# Altium PCB PCB.PcbDoc
Units mm, origin at the board's own origin, x right, y up, seen from the top; angles counter-clockwise.
Board outline 55 x 45 mm, 2 copper layers (TOP, BOT), stack 1.636 mm thick; 43 components, 30 nets, 130 pads, 37 vias.
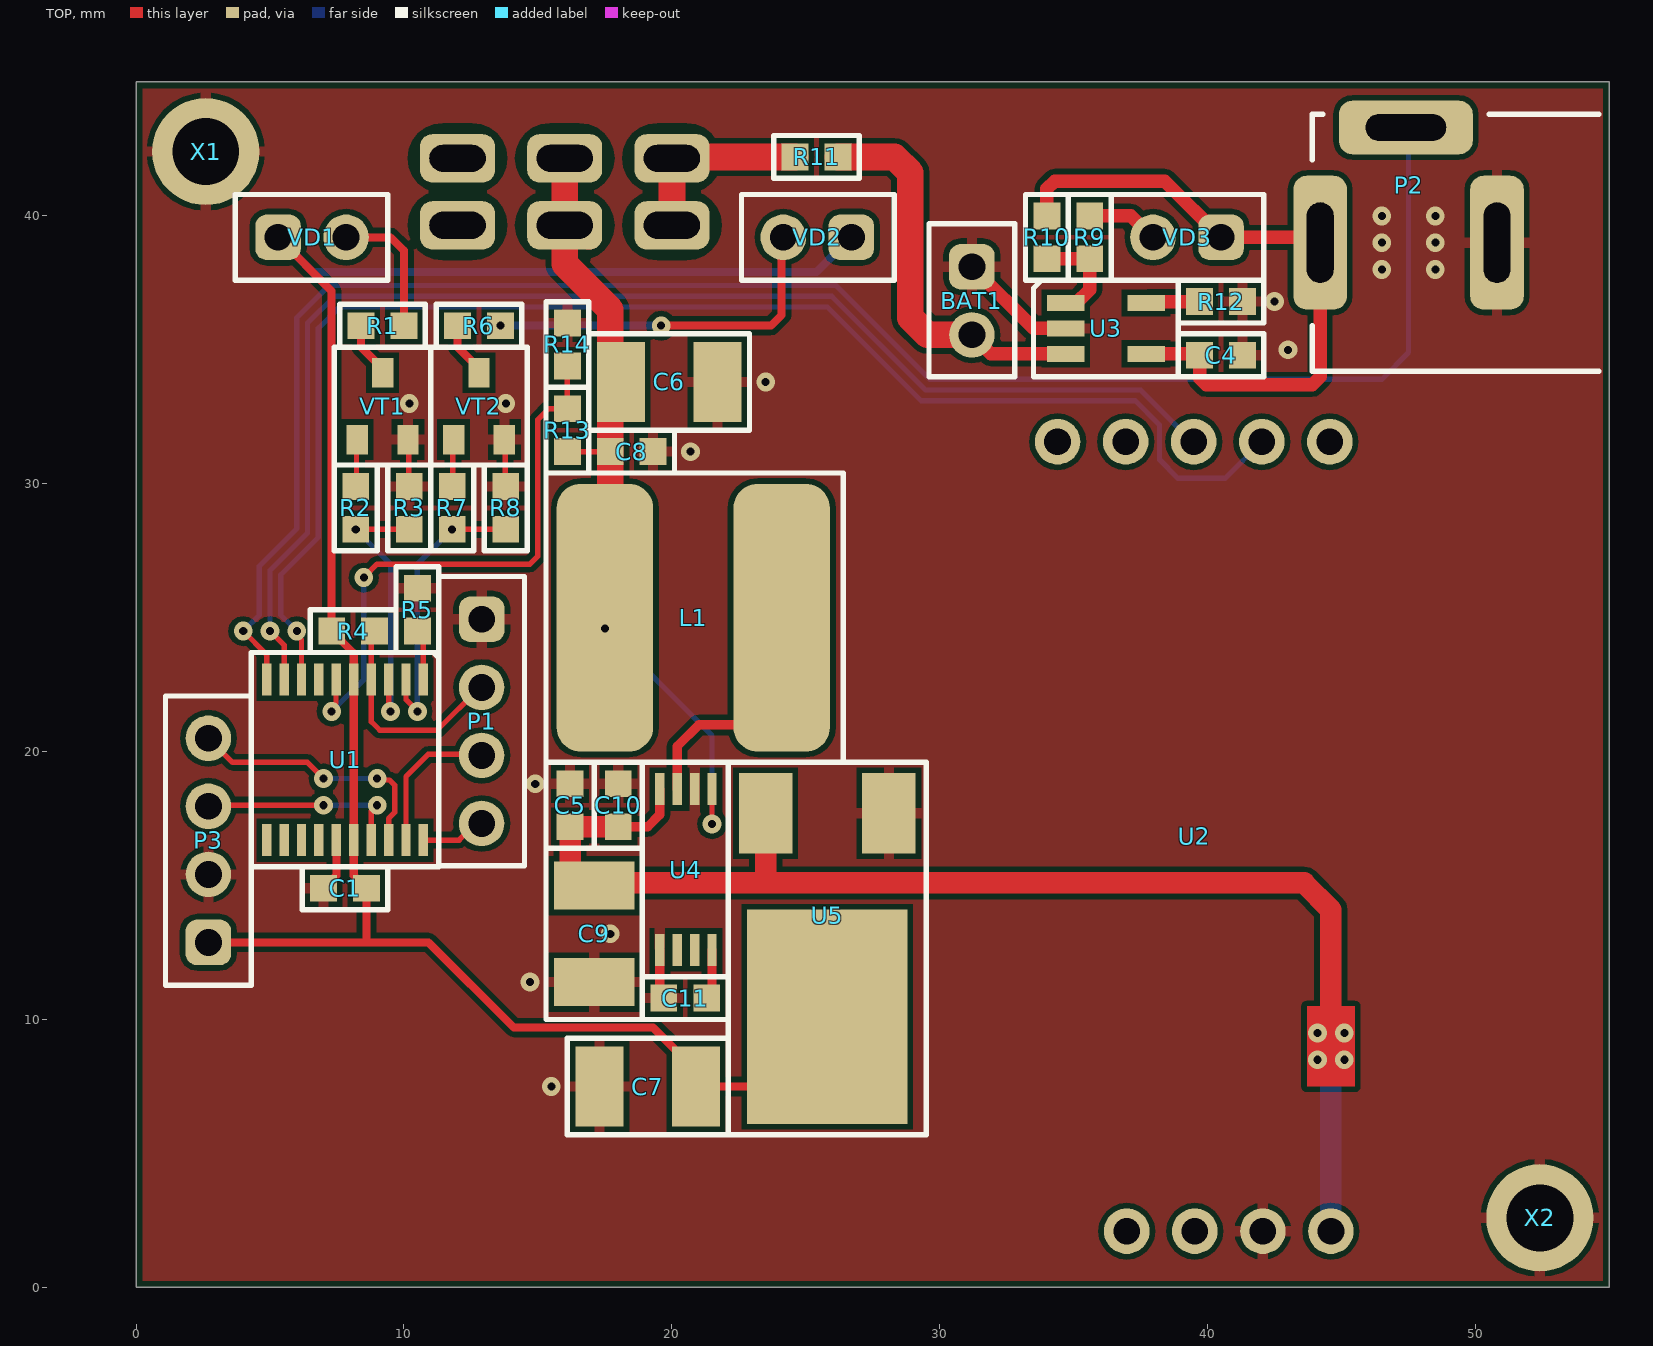
[diagram p0: TOP view]
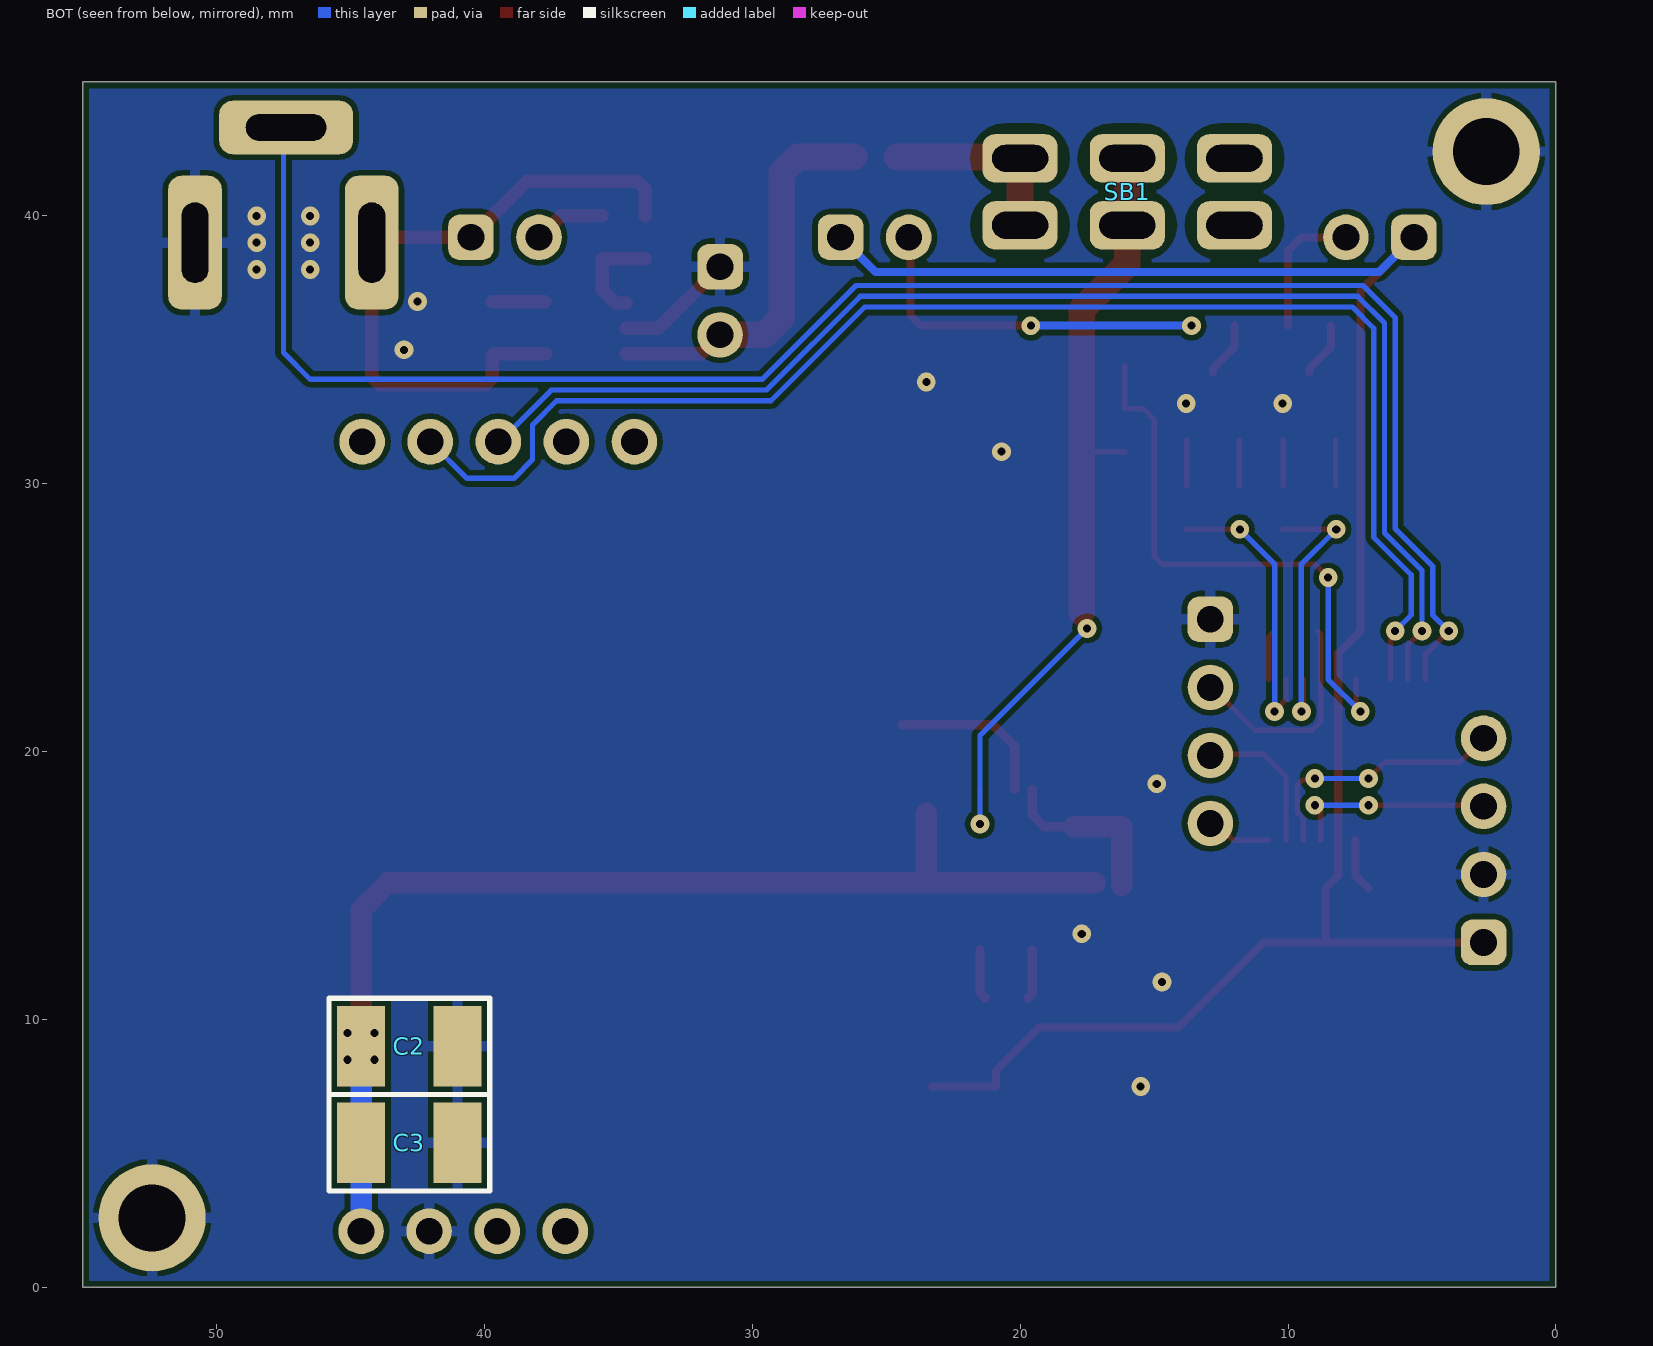
[diagram p1: BOT view, seen from below]
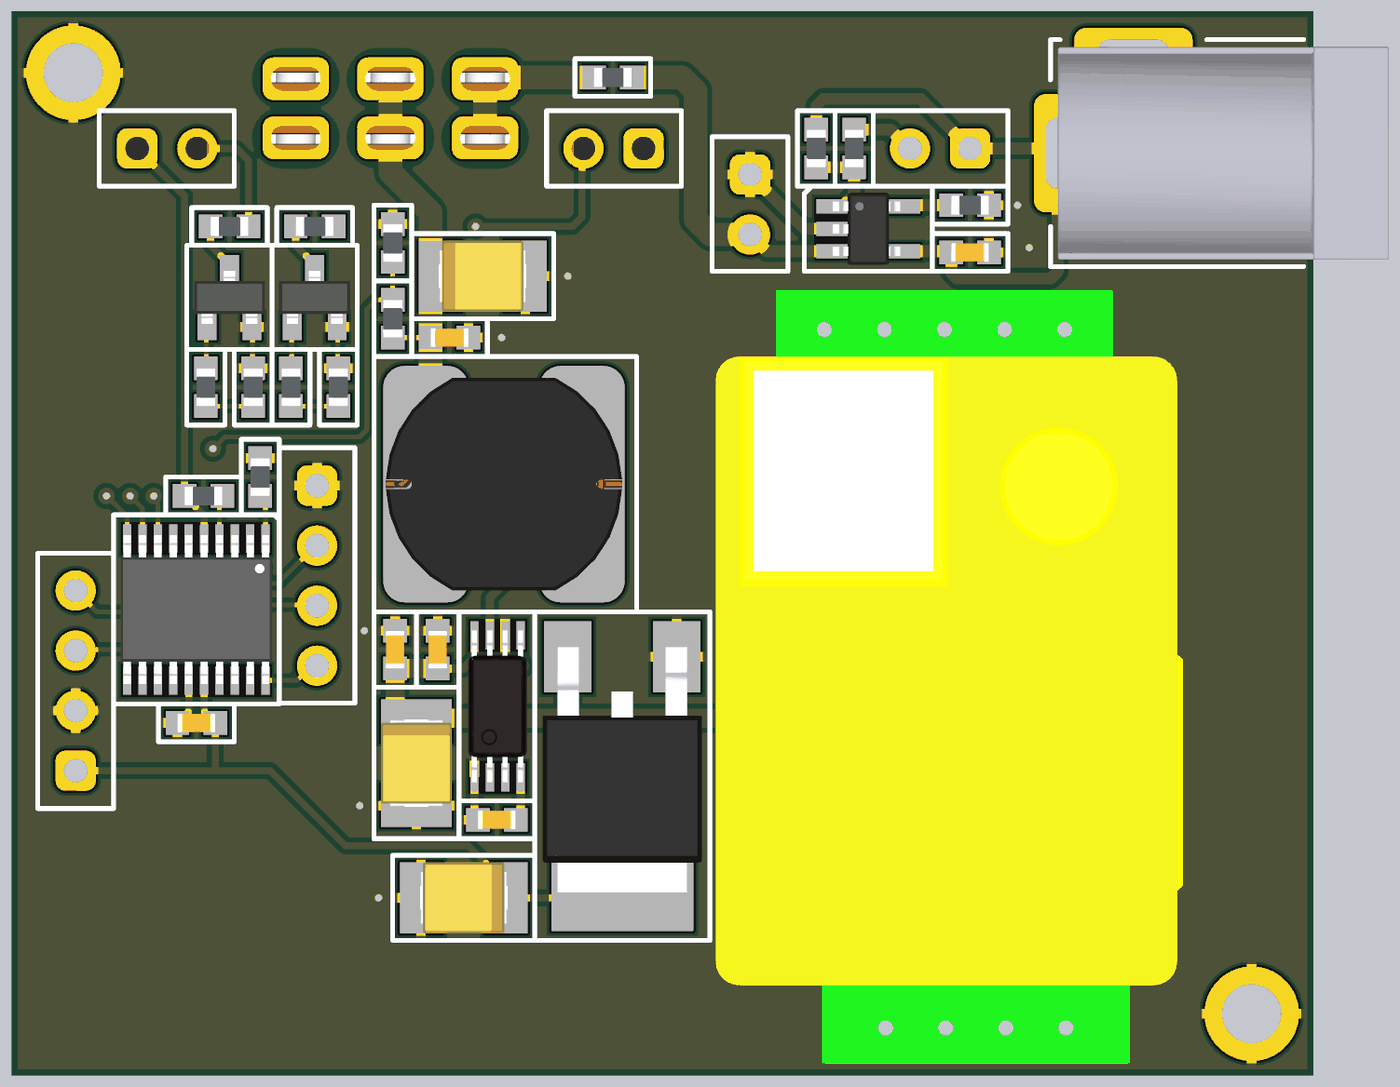
[diagram p2: 3D render of the assembled board from above, using the file's embedded part models]
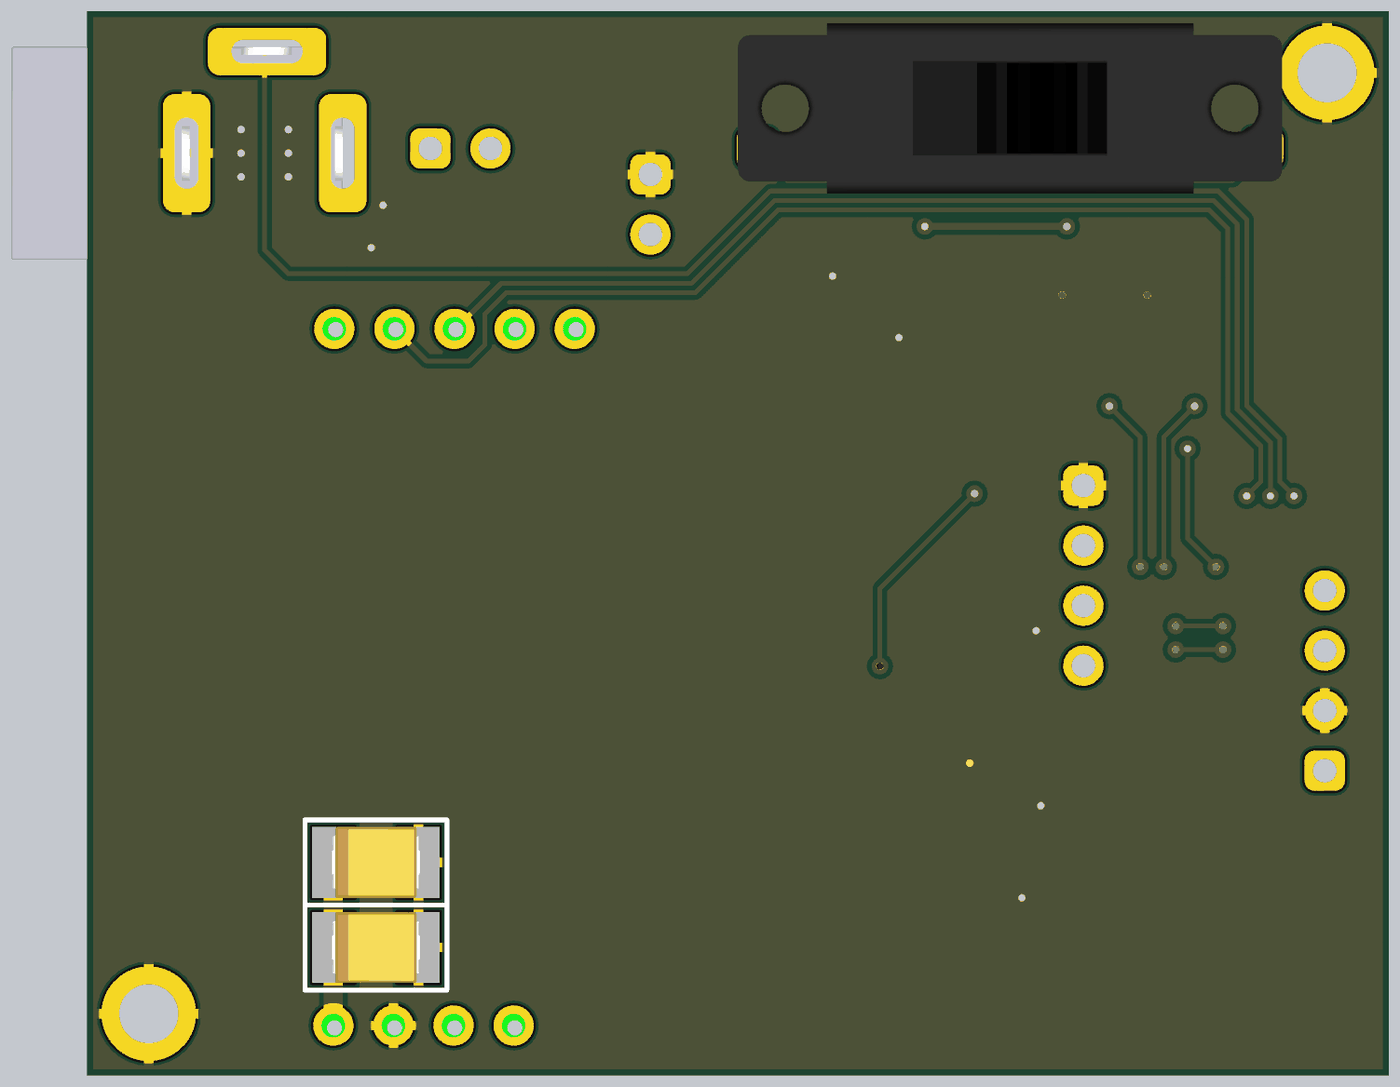
[diagram p3: 3D render of the assembled board from below, using the file's embedded part models]

## Layer stack, top to bottom
Top Solder: solder mask 0.0102, Solder Resist, Dk 3.5
TOP: signal copper 0.018
Dielectric 1: core 1.6, FR-4, Dk 4.2
BOT: signal copper 0.018
Bottom Solder: solder mask 0.0102, Solder Resist, Dk 3.5

## Board outline
0,0 0,45 55,45 55,0

## Design rules (kind name [scope] priority, off if disabled: settings)
AcuteAngle [All] p1 off: minimum=3.50000000000000E+0001 checktracksonly=FALSE
AssemblyTestPointUsage [All] p1 off:
AssemblyTestpoint [All] p1 off: testpointundercomponent=TRUE minsize=1.016 maxsize=2.54 preferedsize=1.524 minholesize=0 maxholesize=1.016 preferedholesize=0.813 testpointgrid=0.025 usegrid=TRUE gridtolerance=0 allowsidetop=TRUE allowsidebottom=TRUE
BoardOutlineClearance "BoardOutlineClearance 1" [All] p1: gap=0.25 ignorepadtopadclearanceinfootprint=FALSE except(0: Arc-SplitContinuation Track-SplitContinuation SMDPad-SplitContinuation THPad-SplitContinuation Via-SplitContinuation Fill-SplitContinuation Poly-SplitContinuation Region-SplitContinuation Text-SplitContinuation) // Milling
BoardOutlineClearance "BoardOutlineClearance 2" [All] p2: gap=0.4 ignorepadtopadclearanceinfootprint=FALSE except(0: Arc-SplitContinuation Track-SplitContinuation SMDPad-SplitContinuation THPad-SplitContinuation Via-SplitContinuation Fill-SplitContinuation Poly-SplitContinuation Region-SplitContinuation Text-SplitContinuation) // V-Cut
Clearance "Clearance-1 1 Oz" [All] p1: gap=0.2 ignorepadtopadclearanceinfootprint=FALSE except(0.25: Arc-Hole Track-Hole SMDPad-Hole THPad-Hole Via-Hole Fill-Hole Poly-Hole Region-Hole Text-Hole) // Standart
Clearance "Clearance-1 1/2 Oz" [All] p2: gap=0.125 ignorepadtopadclearanceinfootprint=FALSE except(0.2: Arc-Fill Arc-Poly Track-Fill Track-Poly SMDPad-SMDPad SMDPad-Fill SMDPad-Poly THPad-Fill THPad-Poly Via-Fill Via-Poly Fill-Fill Fill-Poly Poly-Poly Poly-Region Poly-Text; 0.25: Arc-Hole Track-Hole SMDPad-Hole THPad-Hole Via-Hole Fill-Hole Poly-Hole Region-Hole Text-Hole) // Standart
Clearance "Clearance-2 1 Oz" [All] p3: gap=0.15 ignorepadtopadclearanceinfootprint=FALSE except(0.2: Arc-Fill Arc-Poly Track-Fill Track-Poly SMDPad-Fill SMDPad-Poly THPad-Fill THPad-Poly Via-Fill Via-Poly Fill-Fill Fill-Poly Poly-Poly; 0.25: Arc-Hole Track-Hole SMDPad-Hole THPad-Hole Via-Hole Fill-Hole Poly-Hole Region-Hole Text-Hole) // Advance
Clearance "Clearance-2 1/2 Oz" [All] p4: gap=0.1 ignorepadtopadclearanceinfootprint=FALSE except(0.15: Arc-Fill Arc-Poly Track-Fill Track-Poly SMDPad-SMDPad SMDPad-Fill SMDPad-Poly THPad-Fill THPad-Poly Via-Fill Via-Poly Fill-Fill Fill-Poly Poly-Poly Poly-Region Poly-Text; 0.25: Arc-Hole Track-Hole SMDPad-Hole THPad-Hole Via-Hole Fill-Hole Poly-Hole Region-Hole Text-Hole) // Advance
ComponentClearance [All] p1: gap=0 collisioncheckmode=3 verticalgap=0 showdistances=FALSE
DiffPairsRouting "DiffPairsRouting 1 Oz" [All] p1: maxlimit=0.254 minlimit=0.2 mostfreqgap=0.254 toplayer_minwidth=0.2 toplayer_maxwidth=0.381 toplayer_prefwidth=0.381 bottomlayer_minwidth=0.2 bottomlayer_maxwidth=0.381 bottomlayer_prefwidth=0.381 maxuncoupledlength=12.7
DiffPairsRouting "DiffPairsRouting 1/2 Oz" [All] p2: maxlimit=0.254 minlimit=0.1 mostfreqgap=0.254 toplayer_minwidth=0.1 toplayer_maxwidth=0.381 toplayer_prefwidth=0.381 bottomlayer_minwidth=0.1 bottomlayer_maxwidth=0.381 bottomlayer_prefwidth=0.381 maxuncoupledlength=12.7
FabricationTestPointUsage [All] p1 off: valid=0 allowmultiple=FALSE
FabricationTestpoint [All] p1 off: side=3 testpointundercomponent=TRUE minsize=1.016 maxsize=2.54 preferedsize=1.524 minholesize=0 maxholesize=1.016 preferedholesize=0.813 testpointgrid=0.025 allowsidetop=TRUE allowsidebottom=TRUE usegrid=TRUE gridtolerance=0
HoleSize "Minimum HoleSize" [IsPad] p1: absolutevalues=TRUE maxlimit=5.9 minlimit=0.6 maxpercent=80.000 minpercent=20.000
HoleSize "Minimum HoleSize VIA 1" [IsVia] p2: absolutevalues=TRUE maxlimit=5.9 minlimit=0.3 maxpercent=80.000 minpercent=20.000 // Standart
HoleSize "Minimum HoleSize VIA 2" [IsVia] p3: absolutevalues=TRUE maxlimit=5.9 minlimit=0.2 maxpercent=80.000 minpercent=20.000 // Advance
HoleToHoleClearance Hole2HoleClearance [All] p1: gap=0.25 allowstackedmicrovias=FALSE
MinimumAnnularRing "Minimum AR VIA Standart" [IsVia] p1: minimumring=0.15
MinimumAnnularRing "Minimum AR PAD Standart" [IsPAD] p2: minimumring=0.2
MinimumAnnularRing "Minimum AR VIA Advance" [IsVia] p3: minimumring=0.1
MinimumAnnularRing "Minimum AR PAD Advance" [IsPAD] p4: minimumring=0.15
MinimumSolderMaskSliver "SolderMask Bridge Standart" [All] p1: minsoldermaskwidth=0.15 // All Masks
MinimumSolderMaskSliver "SolderMask Bridge Advance" [All] p2: minsoldermaskwidth=0.1 // Mask LDI
PlaneClearance "PlaneClearance 1 Oz" [All] p1: clearance=0.2
PlaneClearance "PlaneClearance-1 1/2 Oz" [All] p2: clearance=0.2 // Standart
PlaneConnect "TermalConnect 2 Oz" [All] p1: planeconnectstyle=Relief reliefexpansion=0.2 reliefentries=4 reliefconductorwidth=0.3 reliefairgap=0.3 // Standart
PlaneConnect "TermalConnect-1 1 Oz" [All] p2: planeconnectstyle=Relief reliefexpansion=0.2 reliefentries=4 reliefconductorwidth=0.2 reliefairgap=0.2 // Standart
PlaneConnect "TermalConnect-1 1/2 Oz" [All] p3: planeconnectstyle=Relief reliefexpansion=0.2 reliefentries=4 reliefconductorwidth=0.2 reliefairgap=0.2 // Standart
PolygonConnect "PolygonConnect-1 1 Oz" [All] p1: thpad.connectstyle=Relief thpad.reliefconductorwidth=0.4 thpad.reliefentries=4 thpad.polygonreliefangle="90 Angle" thpad.airgapwidth=0.2 smdpad.connectstyle=Relief smdpad.reliefconductorwidth=0.4 smdpad.reliefentries=4 smdpad.polygonreliefangle="90 Angle" smdpad.airgapwidth=0.2 via.connectstyle=Direct via.reliefconductorwidth=0.254 via.reliefentries=4 via.polygonreliefangle="90 Angle" via.airgapwidth=0.254 // Standart
PolygonConnect "PolygonConnect-1 1/2 Oz" [All] p2: thpad.connectstyle=Relief thpad.reliefconductorwidth=0.15 thpad.reliefentries=4 thpad.polygonreliefangle="90 Angle" thpad.airgapwidth=0.2 smdpad.connectstyle=Relief smdpad.reliefconductorwidth=0.2 smdpad.reliefentries=4 smdpad.polygonreliefangle="90 Angle" smdpad.airgapwidth=0.2 via.connectstyle=Direct via.reliefconductorwidth=0.254 via.reliefentries=4 via.polygonreliefangle="90 Angle" via.airgapwidth=0.254 // Standart
RoutingCorners [All] p1 off: cornerstyle=45-Degree minsetback=2.54 maxsetback=2.54
RoutingVias [All] p1: holewidth=0.3 width=0.6 viastyle="Through Hole" minholewidth=0.2 minwidth=0.4 maxholewidth=5.9 maxwidth=6.4
SilkToBoardRegionClearance [All] p1 off:
SilkToSilkClearance Silk2SilkClearance [All] p1 off: silktosilkclearance=0.15
SilkToSolderMaskClearance Silk2SolderMaskClearance [IsPad] p1 off: minsilkscreentomaskgap=0.15 clearancetoexposedcopper=TRUE
SolderMaskExpansion SolderMaskExpansion-1 [All] p1: expansion=0.1 istentingtop=FALSE // Standart
SolderMaskExpansion "SolderMaskExpansion LDI" [All] p2: expansion=0.025 istentingtop=FALSE // Advance
Width "Width 1 Oz" [All] p1: maxlimit=10 minlimit=0.15 preferedwidth=0.2 checkconnectedcopper=TRUE
15 further rules are at their usual default settings.

## Components (designator, comment, footprint, x,y, rotation, side; value= is the part's Value field where it differs from the comment)
BAT1 "19650 Li-ion 3.7V" "PLS-2 2.54" 31.2,38.1 r270 top
C1 "1u 25V" C_0603/1608 7.8,14.9 r180 top
C2 "47u 10V" TECAP_TYPE_B 42.8,9 r180 bottom
C3 "47u 10V" TECAP_TYPE_B 42.8,5.4 r180 bottom
C4 "1u 25V" C_0603/1608 40.5,34.8 r0 top
C5 "1u 25V" C_0603/1608 16.2,18 r90 top
C6 "47u 10V" TECAP_TYPE_B 19.9,33.8 r0 top
C7 "47u 10V" TECAP_TYPE_B 19.1,7.5 r180 top
C8 "1u 25V" C_0603/1608 18.5,31.2 r0 top
C9 "47u 10V" TECAP_TYPE_B 17.1,13.2 r270 top
C10 "100n 25V" C_0603/1608 18,18 r90 top
C11 "100n 25V" C_0603/1608 20.5,10.8 r180 top
L1 "10u 1A (SDR1006-100ML)" L_1006 20.8,25 r0 top
P1 "Debug" "PLS-4 2.54" 12.9,24.94 r270 top
P2 "External power" DC-210 49.7,39 r90 top
P3 "Debug" "PLS-4 2.54" 2.7,12.88 r90 top
R1 "1k" R_0603/1608 9.2,35.9 r0 top
R2 "1k" R_0603/1608 8.2,29.1 r270 top
R3 "100k" R_0603/1608 10.2,29.1 r270 top
R4 "100k" R_0603/1608 8.1,24.5 r0 top
R5 "100k" R_0603/1608 10.5,25.3 r270 top
R6 "1k" R_0603/1608 12.8,35.9 r0 top
R7 "1k" R_0603/1608 11.8,29.1 r270 top
R8 "100k" R_0603/1608 13.8,29.1 r270 top
R9 "15k" R_0603/1608 35.6,39.2 r90 top
R10 "100k" R_0603/1608 34,39.2 r90 top
R11 "1R" R_0603/1608 25.4,42.2 r0 top
R12 "3k" R_0603/1608 40.5,36.8 r0 top
R13 "10k" R_0603/1608 16.1,32 r270 top
R14 "10k" R_0603/1608 16.1,35.2 r270 top
SB1 "Power switch" KBB40_2P2W 16,40.9 r270 bottom
U1 "STM32F030F4P6" SO20_0.65 7.8,19.7 r270 top
U2 "MH-Z19" MH-Z19 39.5,16.8 r180 top
U3 "STC4054GR" SOT23-5 36.2,35.8 r0 top
U4 "L6920DTR" SO8_0.65 20.6,15.6 r90 top locked
U5 "MC33269DT-3.3G" TO252AA/DPAK 25.8,12.1 r180 top
VD1 "" "PLS-2 2.54" 5.3,39.2 r0 top
VD2 "" "PLS-2 2.54" 26.7,39.2 r180 top
VD3 "" "PLS-2 2.54" 40.5,39.2 r180 top
VT1 "IRLML6244" SOT23-3 9.2,32.9 r90 top
VT2 "IRLML6244" SOT23-3 12.8,32.9 r90 top
X1 "Mounting hole" HOLE_M2_D4.0/2.5 2.6,42.4 r0 top
X2 "Mounting hole" HOLE_M2_D4.0/2.5 52.4,2.6 r0 top

## Footprints (in the part's own frame and the unit in brackets; to place one, negate y for a bottom-side part, rotate by r counter-clockwise, add the part's x,y. Pads: shape width x height; smd on the part's side, far side on the other; paste and mask are expansions set on the pad)
C_0603/1608 [mm] "Capacitor, SMD, 0603 (1608 metric)"
  rect 1x1 smd mask+0.1: 1(-0.8,0) 2(0.8,0)
  silkscreen extent -1.6,-0.8 1.6,0.8, body extent -0.8,-0.4 0.8,0.4, height 0.7
DC-210 [mm] "Pitch 2.54"
  rrect50% 5x2 hole 1 slot 3 at 0 deg mask+0.1: 1(0,5.5) 2(0,-1.1)
  rrect50% 2x5 hole 1 slot 3 at 90 deg mask+0.1: 3(4.3,2.3)
  silkscreen extent -4.8,-4.9 4.8,5.8, body extent -4.51,-8.5 4.5,5.5, height 11
HOLE_M2_D4.0/2.5 [mm]
  round 4 hole 2.5 mask+0.1: 1(0,0)
KBB40_2P2W [mm] "Slider switch 3x2-pin"
  rrect50% 1.8x2.8 hole 2.1 slot 1 at 0 deg mask+0.1: 1(-1.25,0) 1(1.25,0) 2(-1.25,4) 2(1.25,4) 3(-1.25,-4) 3(1.25,-4)
  body extent -3.6,-11.5 3.6,11.5, height 15.4
L_1006 [mm] "Inductor, SMD, 1006"
  rrect50% 3.6x10 smd mask+0.1: 1(-3.3,0)
  rrect50% 3.6x10 smd: 2(3.3,0)
  silkscreen extent -5.5,-5.4 5.6,5.4, body extent -5,-4.5 5,4.5, height 4.08
MH-Z19 [mm]
  round 1.7 hole 1: 1(5.1,-14.77) 2(2.56,-14.77) 3(0.02,-14.77) 4(-2.52,-14.77) 5(-5.06,-14.77)
  round 1.7 hole 1 mask+0.1: 6(-5.1,14.7) 7(-2.56,14.7) 8(-0.02,14.7) 9(2.52,14.7)
  body extent -10,-16.4 9.75,16.3, height 11.25
"PLS-2 2.54" [mm] "Pitch 2.54"
  rrect50% 1.7x1.7 hole 1 mask+0.1: 1(0,0)
  round 1.7 hole 1 mask+0.1: 2(2.54,0)
  silkscreen extent -1.6,-1.6 4.1,1.6
"PLS-4 2.54" [mm] "Pitch 2.54"
  rrect50% 1.7x1.7 hole 1 mask+0.1: 1(0,0)
  round 1.7 hole 1 mask+0.1: 2(2.54,0) 3(5.08,0) 4(7.62,0)
  silkscreen extent -1.6,-1.6 9.2,1.6
R_0603/1608 [mm] "Resistor, SMD, 0603 (1608 metric)"
  rect 1x1 smd mask+0.1: 1(-0.8,0) 2(0.8,0)
  silkscreen extent -1.6,-0.8 1.6,0.8, body extent -0.8,-0.4 0.8,0.4, height 0.45
SO8_0.65 [mm]
  rect 1.2x0.35 smd mask+0.1: 1(-3,1.05) 2(-3,0.4) 3(-3,-0.25) 4(-3,-0.9) 5(3,-0.9) 6(3,-0.25) 7(3,0.4) 8(3,1.05)
  silkscreen extent -4,-1.5 4,1.7, body extent -3.21,-1.17 3.22,1.32, height 1.11
SO20_0.65 [mm]
  rect 1.2x0.35 smd mask+0.1: 1(-3,2.925) 2(-3,2.275) 3(-3,1.625) 4(-3,0.975) 5(-3,0.325) 6(-3,-0.325) 7(-3,-0.975) 8(-3,-1.625) 9(-3,-2.275) 10(-3,-2.925) 11(3,-2.925) 12(3,-2.275) 13(3,-1.625) 14(3,-0.975) 15(3,-0.325) 16(3,0.325) 17(3,0.975) 18(3,1.625) 19(3,2.275) 20(3,2.925)
  silkscreen extent -4,-3.5 4,3.5, body extent -3.15,-3.2 3.15,3.2, height 1
SOT23-3 [mm] "SOT23, 3 pins"
  rect 1.1x0.8 smd mask+0.1: 1(-1.25,0.95) 2(-1.25,-0.95) 3(1.25,0)
  silkscreen extent -2.2,-1.8 2.2,1.8, body extent -1.13,-1.5 1.13,1.5, height 1.22
SOT23-5 [mm]
  rect 1.4x0.6 smd mask+0.1: 1(-1.5,0.95) 2(-1.5,0) 3(-1.5,-0.95) 4(1.5,-0.95) 5(1.5,0.95)
  silkscreen extent -2.7,-1.8 2.7,1.8, body extent -1.5,-1.53 1.5,1.52, height 1.45
TECAP_TYPE_B [mm] "Tantalum capacitor, Type B, SMD"
  rect 1.8x3 smd: 1(-1.8,0) 2(1.8,0)
  silkscreen extent -3,-1.8 3,1.8, body extent -1.85,-1.5 1.85,1.5, height 2.1
TO252AA/DPAK [mm] "TO252AA/DPAK package"
  rect 2x3 smd mask+0.1: 1(-2.3,-5.6) 2(2.3,-5.6)
  rect 6x8 smd mask+0.1: 3(0,2)
  silkscreen extent -3.7,-7.5 3.7,6.4, body extent -3.37,-6.01 3.37,4.38, height 2.39

## Part data
BAT1: library part Battery, "Battery"
C1 C4 C5 C8 C10 C11: library part Capacitor, "Non-polarized capacitor"
C2 C3 C6 C7 C9: library part "Capacitor polar", "Polarized capacitor"
L1: library part Inductor, "Inductor"
P1 P3: library part "Header 4", "Header, 4-Pin", LatestRevisionDate=17-Jul-2002, LatestRevisionNote="Re-released for DXP Platform.", Publisher="Altium Limited"
P2: library part DC-210, "Power connector 3.5mm", LatestRevisionDate=17-Jul-2002, LatestRevisionNote="Re-released for DXP Platform.", Publisher="Altium Limited"
R1 R2 R3 R4 R5 R6 R7 R8 R9 R10 R11 R12 R13 R14: library part Resistor, "Resistor"
SB1: library part "Switch 3-pin", "Switch 3-pin"
U1: library part STM32F030F, "32-bit Cortex-M0"
U2: "CO2 sensor"
U3: "Li-ion charger"
U4: "DC-DC step-up switching regulator"
U5: library part LM1117, "LDO voltage regulator"
VD1 VD2 VD3: library part LED, "LED"
VT1 VT2: library part "MOSFET N", "MOSFET N"
X1 X2: "Hole for screw M3, outline D6"

## Via types
v1: diameter 0.7, hole 0.3, TOP to BOT, tented both sides, 37 vias

## Nets (pads, with @x,y where several pads share a name; then routed paths per layer and width w, separated by ;. In a path a pad name is that pad's centre, name@x,y a point inside that pad or via, vN(x,y) a via of type N, cw(c..) or ccw(c..) an arc to the next point about the centre after c; other vN are vias at no path point)
CHARGE_DET: P2.3 U1.10 | length 67
  TOP w0.2: v1(4,24.5) 4.875,23.625 U1.10
  BOT w0.2: v1(4,24.5) 4.6,25.1 4.6,26.931 6,28.331 6,36.2 7.2,37.4 26.131,37.4 29.631,33.9 46.5,33.9 47.5,34.9 47.5,43.2 P2.3
CO2_RX: U1.8 U2.4 | length 53.5
  TOP w0.2: v1(6,24.5) 6,24.365 6.175,24.19 U1.8
  BOT w0.2: v1(6,24.5) 5.4,25.1 5.4,26.6 6.8,28 6.8,35.8 7.6,36.6 25.8,36.6 29.3,33.1 37.3,33.1 38.2,32.2 38.2,30.9 38.9,30.2 40.65,30.2 U2.4
CO2_TX: U1.9 U2.3 | length 49.6
  TOP w0.2: v1(5,24.5) 5.525,23.975 U1.9
  BOT w0.2: v1(5,24.5) 5,26.766 6.4,28.166 6.4,36 7.4,37 25.966,37 29.466,33.5 37.5,33.5 39.08,31.92 U2.3@39.08,31.57
DGND: BAT1.1 C1.2 C2.2 C3.2 C4.2 C5.2 C6.2 C7.2 C8.2 C9.2 C10.2 C11.2 P1.1 P2.2 P3.2 R3.1 R5.1 R8.1 R12.2 R14.1 U1.15 U2.7 U3.2 U4.1 U4.6 U5.1 VT1.2 VT2.2 X1.1 X2.1 | length 11.6
  TOP w0.2: R3.1@10.175,29.925 VT1.2@10.175,31.625 ; R8.1@13.775,29.925 VT2.2@13.775,31.625
  TOP w0.3: C1.2 7.475,15.375 U1.15
  TOP w0.35: U4.1 19.55,10.95 C11.2
  TOP w0.5: BAT1.1@31.307,37.993 33.5,35.8 U3.2
  other v1: 15.5,7.5 14.7,11.4 17.7,13.2 14.9,18.8 20.7,31.2 10.2,33 13.8,33 23.5,33.8 43,35 42.5,36.8 46.5,38 48.5,38 46.5,39 48.5,39 46.5,40 48.5,40
DVDD_3V3: C1.1 C7.1 P3.1 R4.1 U1.5 U1.16 U5.3 VD1.1 VD2.1 | length 73.3
  TOP w0.3: P3.1 8.6,12.88 ; VD1.1 7.3,37.2 R4.1 8.125,23.675 U1.5 U1.16 8.125,15.375 C1.1 8.6,12.88 ; U5.3@23.3,7.5 C7.1 20.9,8.1 19.3,9.7 14.1,9.7 10.92,12.88 8.6,12.88
  BOT w0.3: VD1.1 6.6,37.9 25.4,37.9 VD2.1
DVDD_5V0: C2.1 C3.1 C5.1 C9.1 C10.1 U2.6 U4.8 U5.2 | length 49.2
  TOP w0.35: C10.1 19.1,17.2 19.55,17.65 U4.8
  TOP w0.8: C9.1@16.2,15 C5.1 C10.1 ; C9.1@17.2,15.1 23.5,15.1 ; U5.2 23.5,15.1 ; 44.6,9 44.6,14.1 43.6,15.1 23.5,15.1 ; U2.6@44.9,2.2 U2.6@45,2.1
  BOT w0.8: U2.6 C3.1 C2.1
  other v1: 44.1,8.5 45.1,8.5 44.1,9.5 45.1,9.5
EXT_5V0: C4.1 P2.1 R10.2 U3.4 VD3.1 | length 22.9
  TOP w0.5: R10.2 34,41.007 34.293,41.3 38.4,41.3 VD3.1 P2.1@43.33,39.2 ; U3.4 C4.1@39.65,34.85 ; C4.1 39.7,33.943 39.943,33.7 43.9,33.7 44.2,34 P2.1@44.2,38
I2C1_SCL: P3.3 U1.17 | length 7.8
  TOP w0.2: P3.3@2.655,18.005 P3.3 ; P3.3@2.7,18.005 6.995,18.005 v1(7,18) ; U1.17 8.775,17.775 v1(9,18)
  BOT w0.2: v1(7,18) v1(9,18)
I2C1_SDA: P3.4 U1.18 | length 10
  TOP w0.2: P3.4@2.555,20.645 3.6,19.6 6.4,19.6 v1(7,19) ; v1(9,19) 9.06,18.94 9.46,18.94 9.65,18.75 9.65,17.731 9.425,17.506 U1.18
  BOT w0.2: v1(7,19) v1(9,19)
MCU_RESET#: P1.2 R4.2 U1.4 | length 8.3
  TOP w0.2: R4.2 8.775,24.375 U1.4 8.783,22.692 8.783,21.117 9.1,20.8 11.239,20.8 12.839,22.4 P1.2
MCU_SWCLK: P1.4 U1.20 | length 2.4
  TOP w0.2: U1.20 12.059,16.7 12.679,17.32 P1.4
MCU_SWDIO: P1.3 U1.19 | length 5.6
  TOP w0.2: U1.19 10.075,19.075 10.9,19.9 12.86,19.9 P1.3
NetBAT1_2: BAT1.2 R11.2 U3.3 | length 14.7
  TOP w0.5: BAT1.2 31.91,34.85 U3.3
  TOP w1: R11.2 28.314,42.2 28.9,41.614 28.9,36.2 29.54,35.56 BAT1.2
NetC11_1: C11.1 U4.4 | length 1.9
  TOP w0.35: C11.1 21.5,11 U4.4
NetL1_2: L1.2 U4.7 | length 6.1
  TOP w0.35: U4.7 20.2,20.2 21,21 L1.2@24.4,21
NetR1_1: R1.1 VT1.3 | length 2.1
  TOP w0.3: R1.1 8.4,35.1 9.2,34.3 VT1.3
NetR1_2: R1.2 VD1.2 | length 5.2
  TOP w0.3: VD1.2 9.5,39.2 10,38.7 R1.2
NetR2_1: R2.1 VT1.1 | length 1.7
  TOP w0.2: R2.1@8.225,29.925 VT1.1@8.225,31.625
NetR5_2: R5.2 U1.1 | length 1.9
  TOP w0.2: R5.2 10.725,24.275 U1.1
NetR6_1: R6.1 VT2.3 | length 2.1
  TOP w0.3: R6.1 12,35.1 12.8,34.3 VT2.3
NetR6_2: R6.2 VD2.2 | length 13.5
  TOP w0.3: v1(19.6,35.9) 23.7,35.9 24.1,36.3 VD2.2@24.1,39.14
  BOT w0.3: v1(13.6,35.9) v1(19.6,35.9)
NetR7_1: R7.1 VT2.1 | length 1.7
  TOP w0.2: R7.1@11.825,29.925 VT2.1@11.825,31.625
NetR9_1: R9.1 R10.1 U3.1 | length 3.9
  TOP w0.5: R10.1 R9.1 35.6,37.25 35.1,36.75 U3.1
NetR9_2: R9.2 VD3.2 | length 2.7
  TOP w0.2: VD3.2@37.934,39.2 VD3.2
  TOP w0.5: R9.2 37.134,40 VD3.2@37.934,39.2
NetR11_1: R11.1 SB1.3 | length 7.1
  TOP w1: SB1.3@20,39.65 20,42.15 20.05,42.2 R11.1
NetR12_1: R12.1 U3.5 | length 2
  TOP w0.2: U3.5 U3.5@37.75,36.8
  TOP w0.5: U3.5@37.75,36.8 R12.1
RED_LED_CTRL: R2.2 R3.2 U1.3 | length 10.6
  TOP w0.2: v1(8.2,28.3) R3.2 ; U1.3 9.425,21.575 v1(9.5,21.5)
  BOT w0.2: v1(8.2,28.3) 9.5,27 v1(9.5,21.5)
VIN_3V7: C6.1 C8.1 L1.1 R13.2 SB1.1 U4.5 | length 30.7
  TOP w0.2: R13.2 C8.1 ; v1(21.5,17.3) U4.5
  TOP w1: SB1.1@16,42.258 16,42.15 SB1.1@16,39.65 ; SB1.1@16.9,39.25 16.5,39.65 SB1.1@16,39.65 ; L1.1@17.7,25.2 C8.1 17.7,33.8 17.7,36.5 16,38.2 SB1.1@16,39.65
  BOT w0.2: v1(17.5,24.6) 21.5,20.6 v1(21.5,17.3)
VIN_ADC: R13.1 R14.2 U1.6 | length 21.6
  TOP w0.2: v1(7.3,21.5) 7.3,21.635 7.465,21.8 7.465,22.69 U1.6 ; v1(8.5,26.5) 9,27 14.7,27 15,27.3 15,32.4 15.4,32.8 R13.1 R14.2
  BOT w0.2: v1(7.3,21.5) 8.5,22.7 v1(8.5,26.5)
YELLOW_LED_CTRL: R7.2 R8.2 U1.2 | length 10.7
  TOP w0.2: U1.2@10.096,22.679 U1.2 10.075,21.942 10.5,21.517 v1(10.5,21.5) ; v1(11.8,28.3) R8.2
  BOT w0.2: v1(10.5,21.5) 10.5,27 v1(11.8,28.3)
pads on no net: SB1.2 U1.7 U1.11 U1.12 U1.13 U1.14 U2.1 U2.2 U2.5 U2.8 U2.9 U4.2 U4.3

## Polygon pours and split planes (outlines as drawn)
DGND on BOT "BOT-DGND" (solid, remove dead copper, pour order 1): 0,0 0,45 55,45 55,0
DGND on TOP "TOP-DGND" (solid, remove dead copper, pour order 2): 0,0 0,45 55,45 55,0

## Other copper
TOP:
  rectangle net DVDD_5V0: 43.7,7.5 45.5,10.5
  pour cut-out: -2,36.5

## Silkscreen, mask and mechanical layers (free items; w line width, h text height)
M4-BOARD:
  the board outline again, w0.2